# Altium PCB PCB1Ard.PcbDoc
Units mil, origin at the board's own origin, x right, y up, seen from the top; angles counter-clockwise.
Board outline 1968.5 x 2559.06 mil, 6 copper layers (Top Layer, Gnd, Signal_1, Signal_2, Power, Bottom Layer), stack 32.112 mil thick; 51 components, 61 nets, 238 pads, 77 vias.
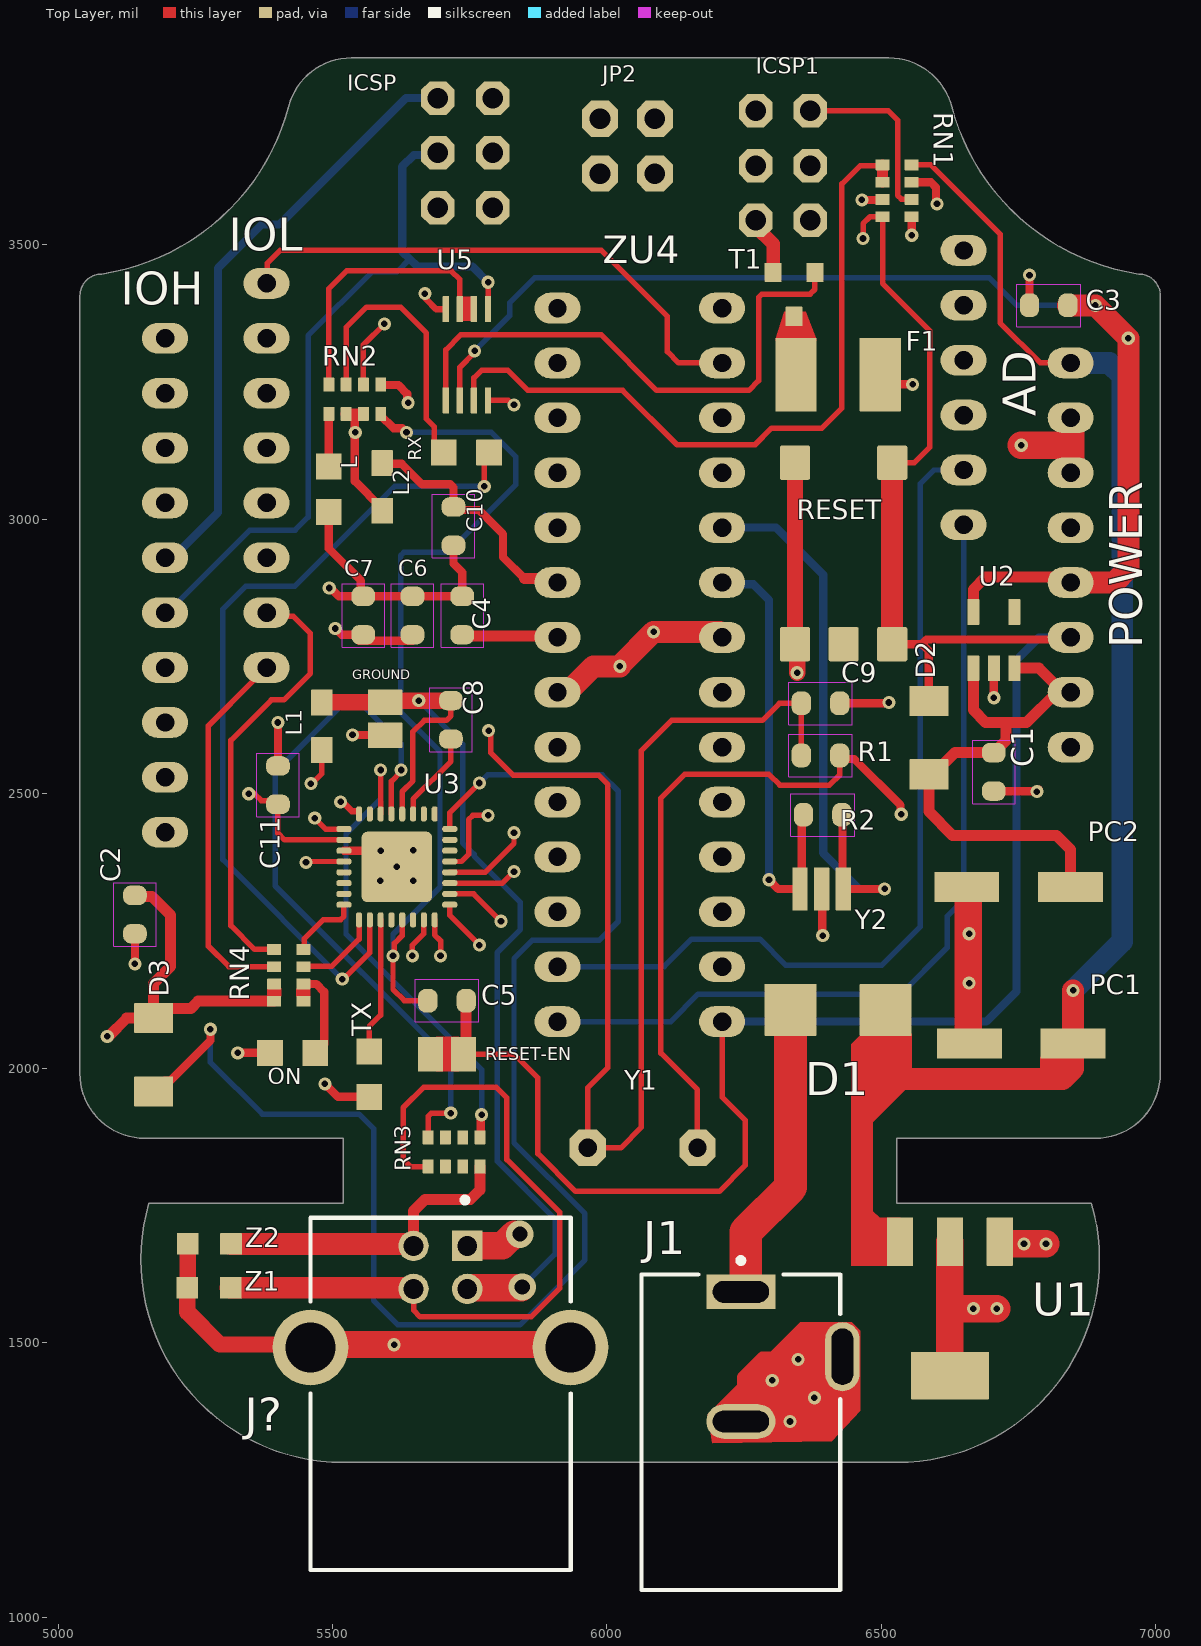
[diagram p0: Top Layer view]
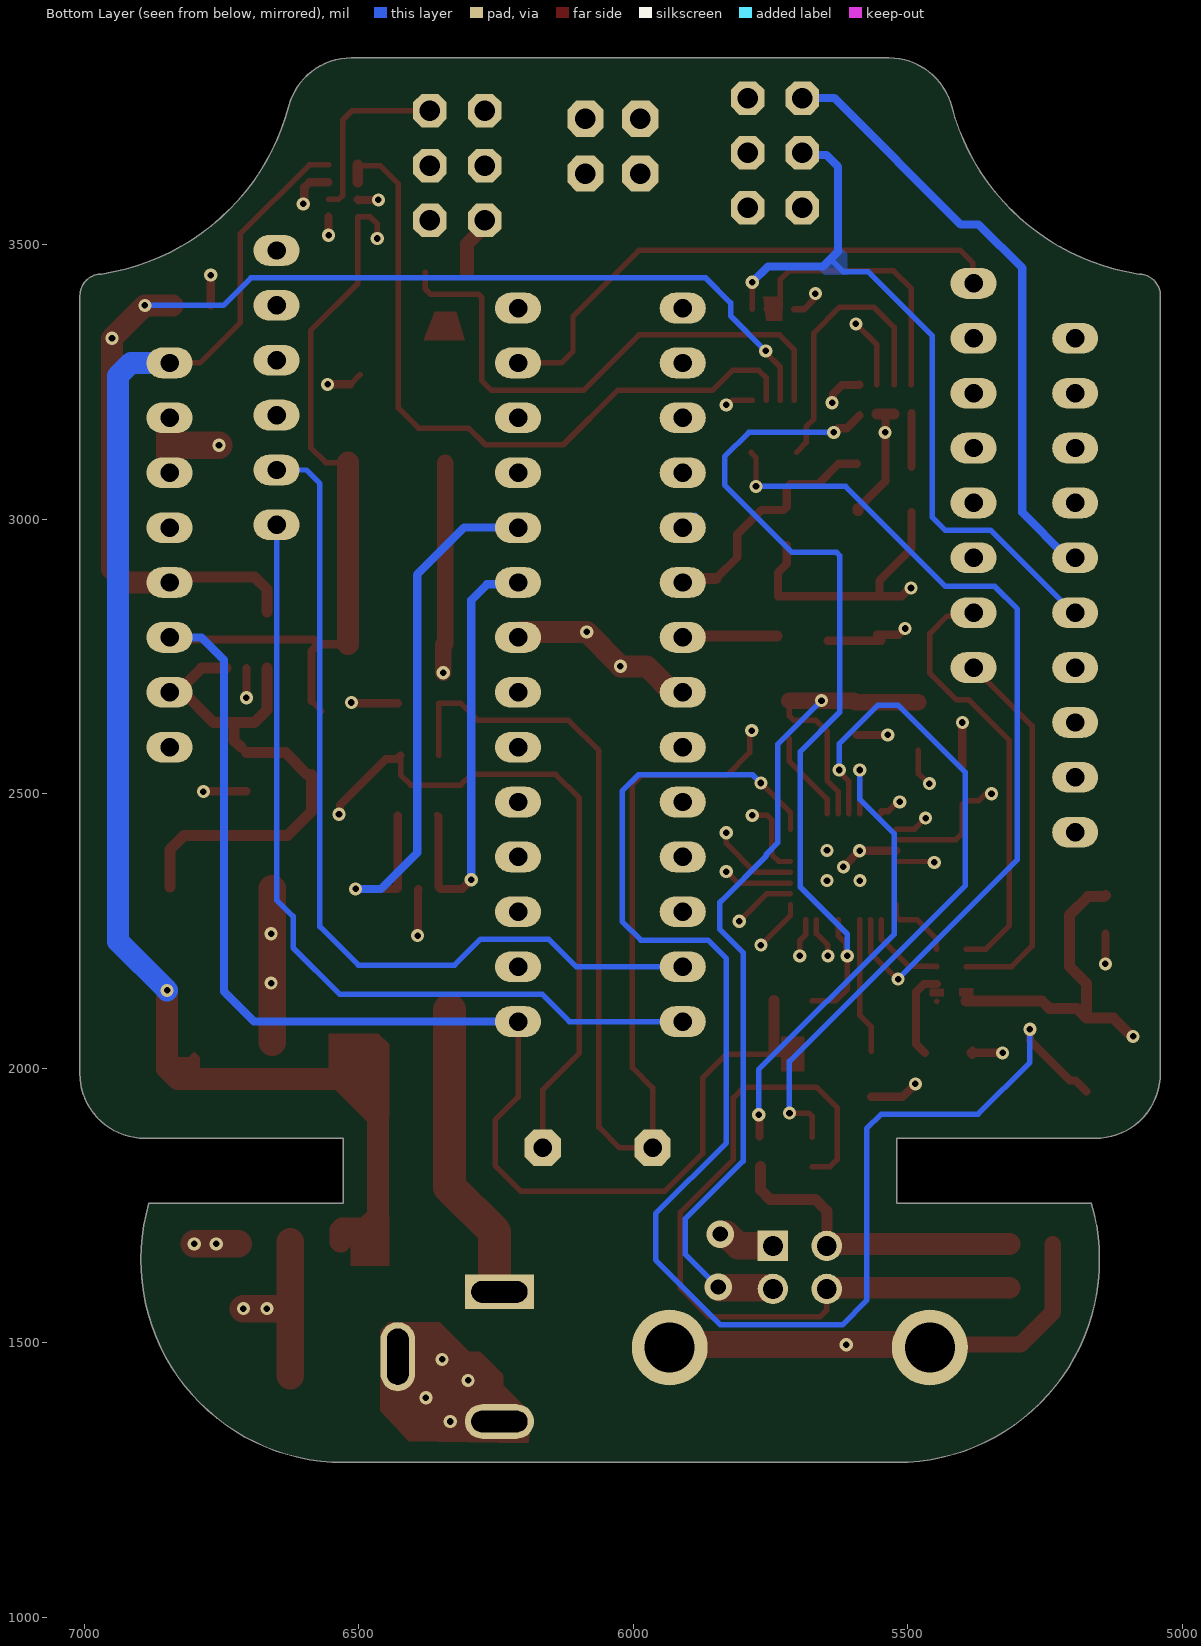
[diagram p1: Bottom Layer view, seen from below]
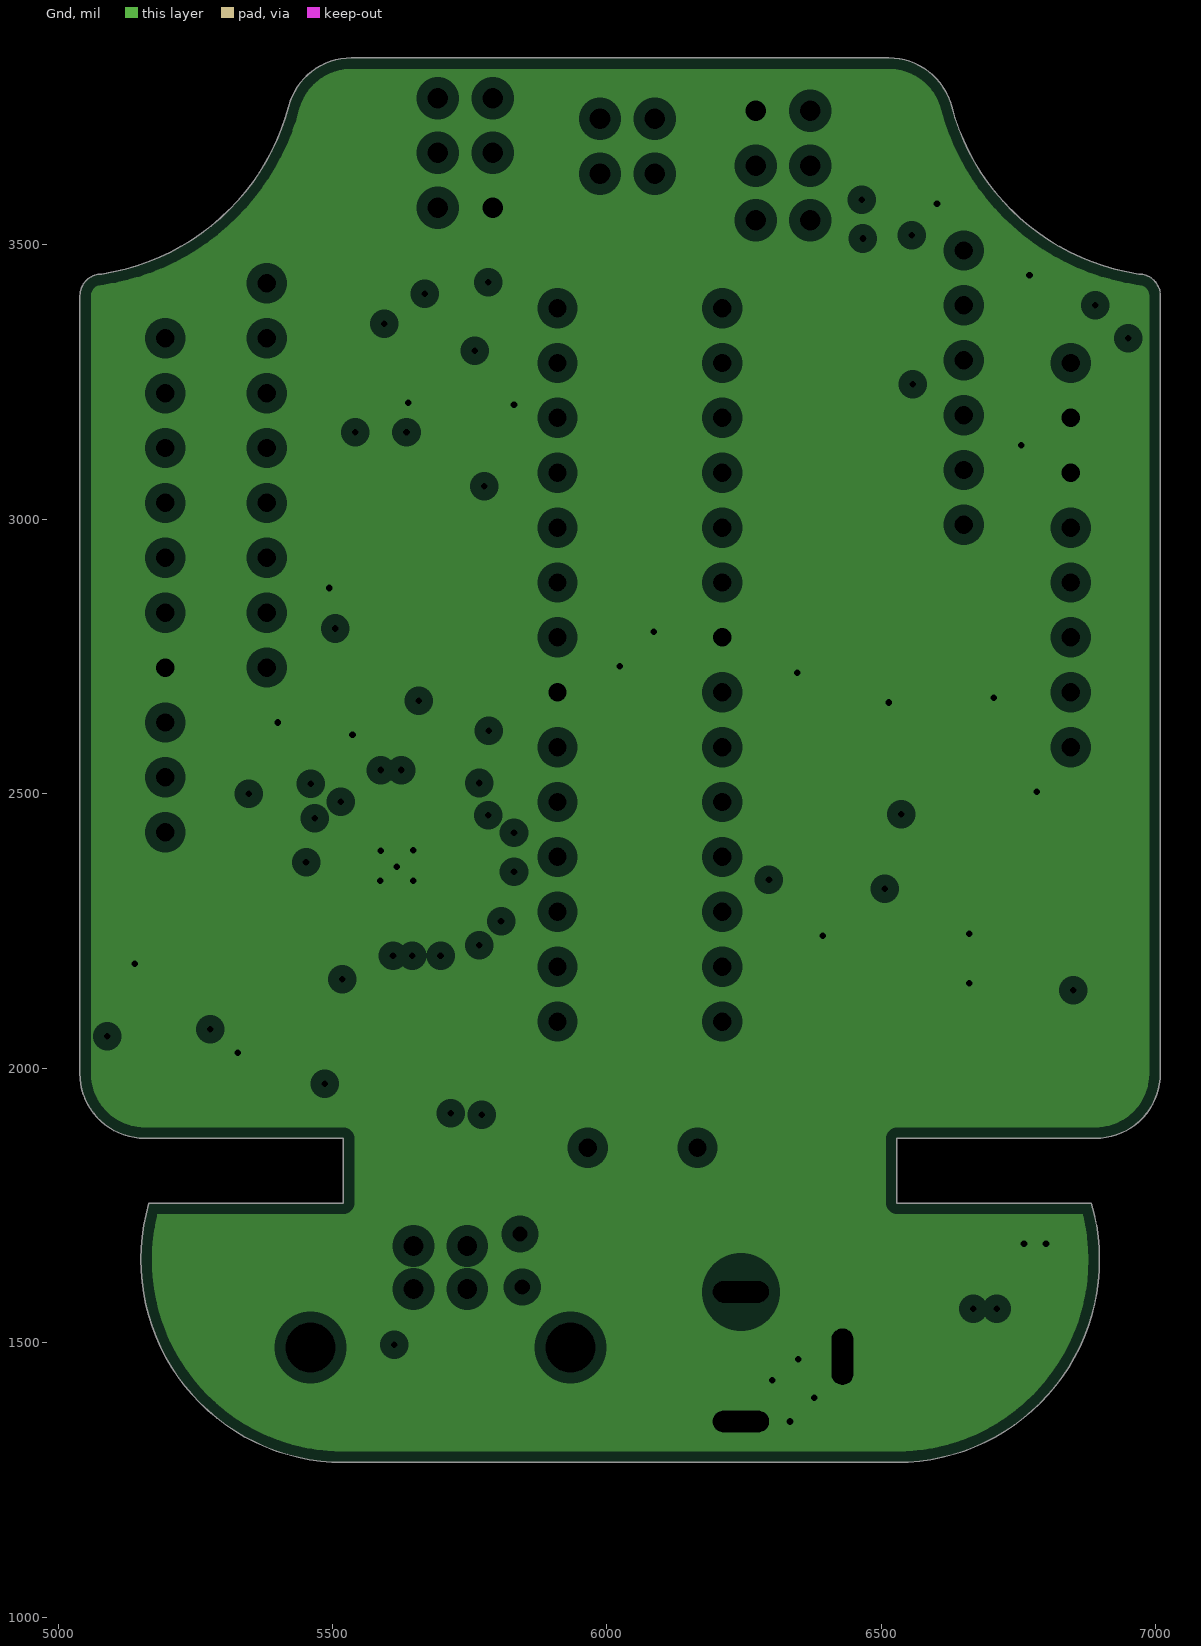
[diagram p2: Gnd, clearances drawn from the general rule]
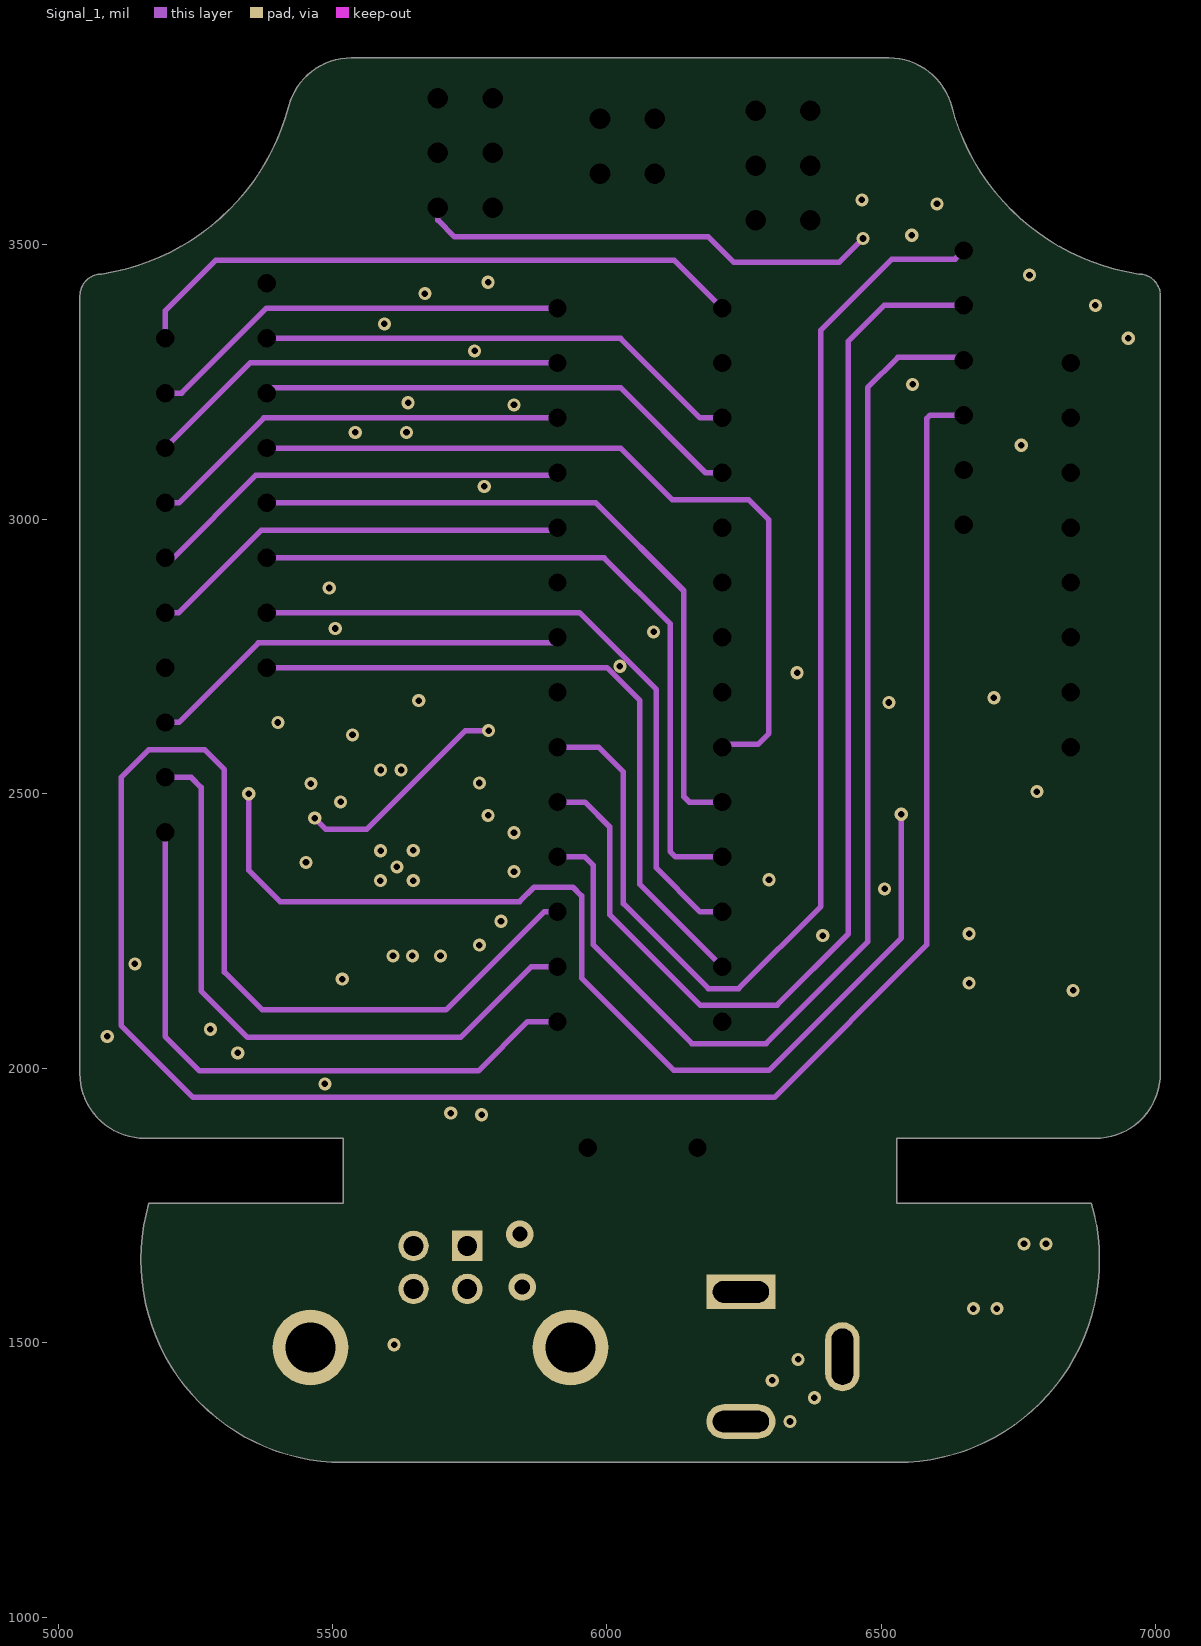
[diagram p3: Signal_1]
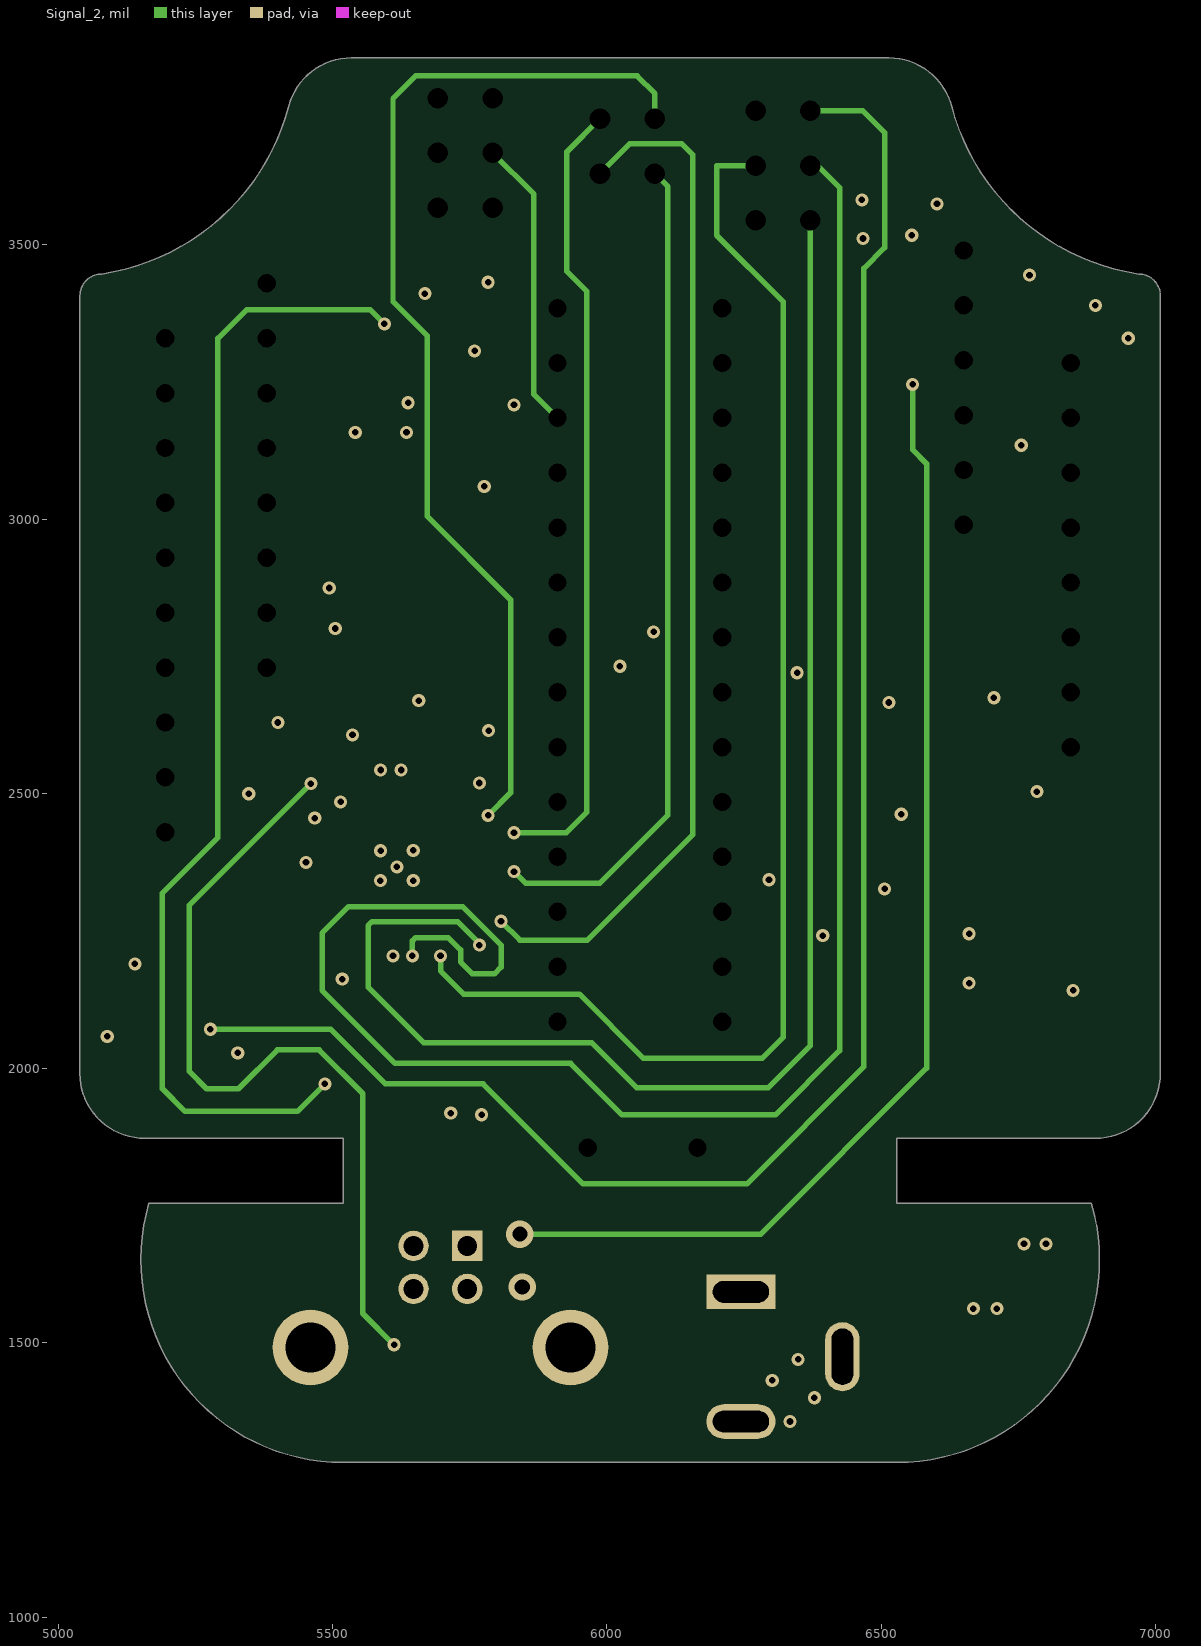
[diagram p4: Signal_2]
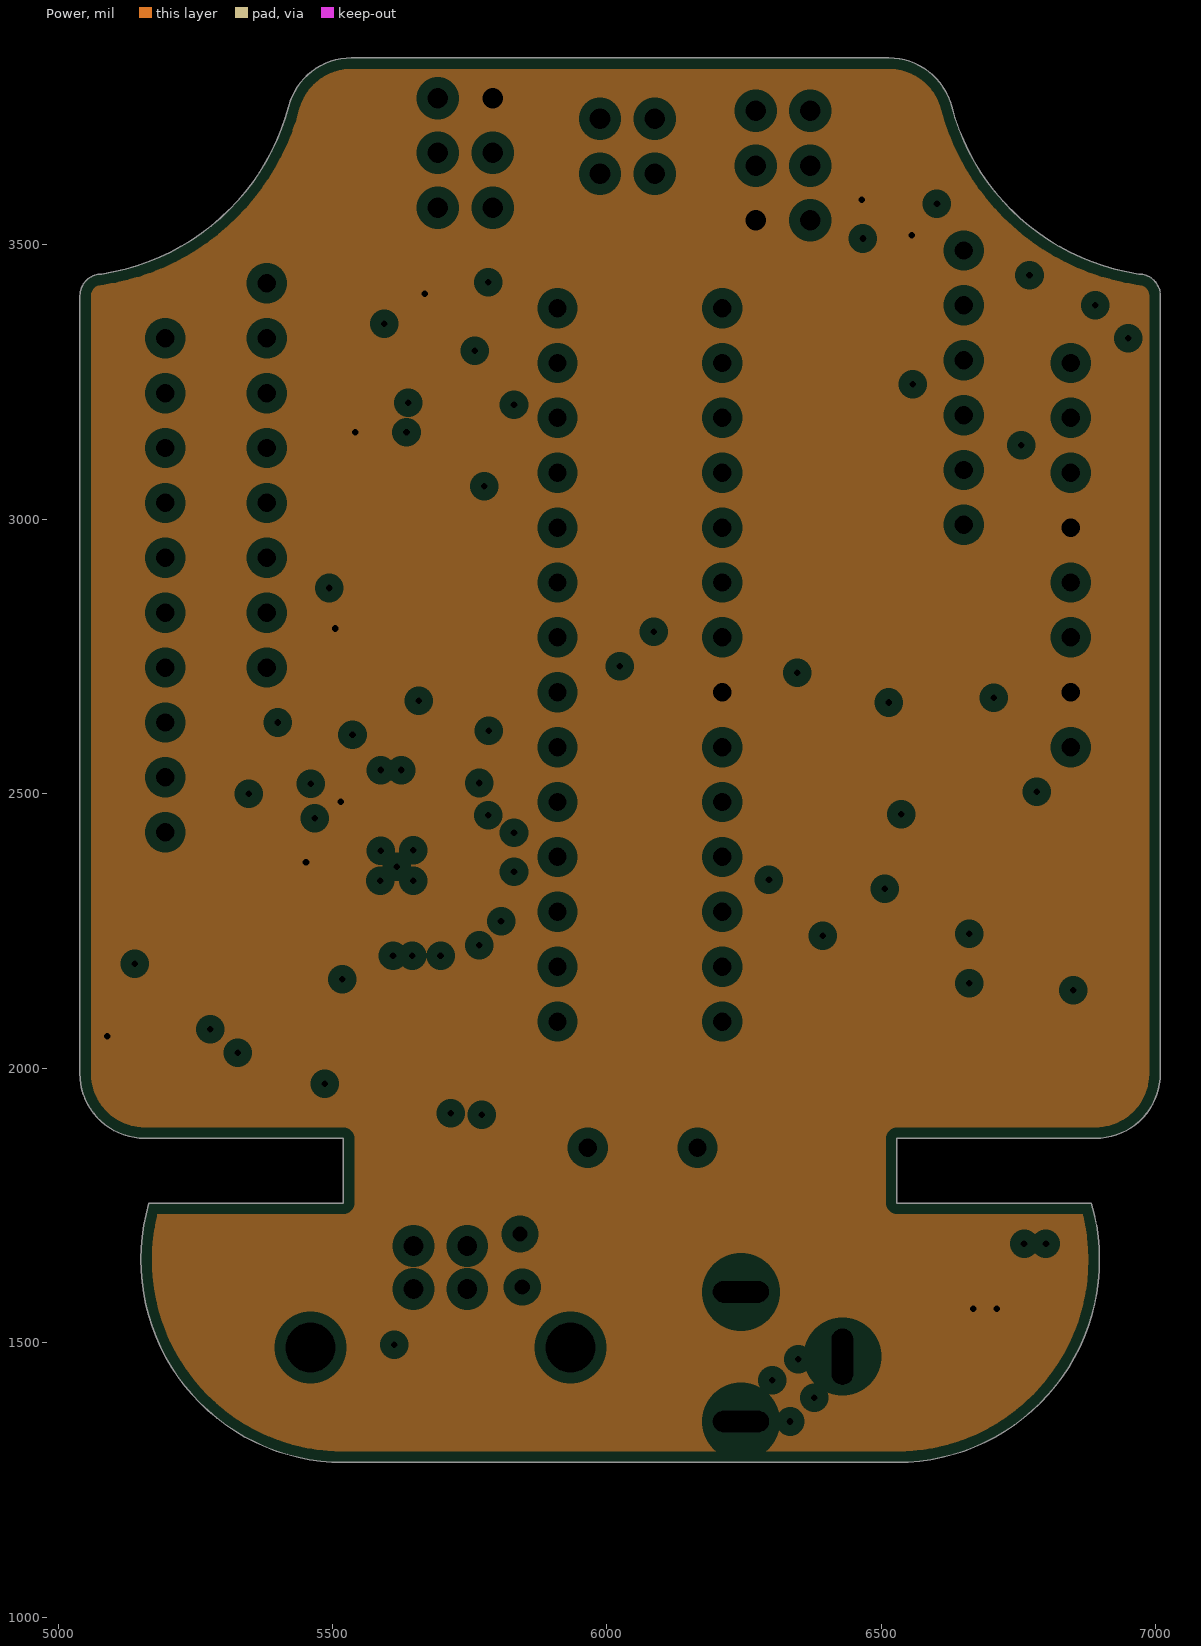
[diagram p5: Power, clearances drawn from the general rule]

## Layer stack, top to bottom
Top Solder: solder mask 0.4, Solder Resist, Dk 3.5
Top Layer: signal copper 1.4
Dielectric 2: prepreg 2.8, PP-006, Dk 4.1
Gnd: plane copper 1.378, net GND
Dielectric 4: prepreg 2.8, PP-006, Dk 4.1
Signal_1: signal copper 1.378
Dielectric 1: dielectric 12.6, FR-4, Dk 4.8
Signal_2: signal copper 1.378
Dielectric 5: prepreg 2.8, PP-006, Dk 4.1
Power: plane copper 1.378, net +5V
Dielectric 3: prepreg 2.8, PP-006, Dk 4.1
Bottom Layer: signal copper 1.4
Bottom Solder: solder mask 0.4, Solder Resist, Dk 3.5

## Board outline
5519.83,1754.15 5519.83,1872.26 5157.97,1872.26 cw(c5157.97,1990.37) 5039.86,1990.37 5039.86,3407.69 cw(c5079.23,3407.69) 5079.23,3447.06 ccw(c5017.47,3858.94) 5420.19,3752.76 cw(c5534.4,3722.65) 5534.4,3840.76 6513.82,3840.76 cw(c6513.82,3722.65) 6628.02,3752.76 ccw(c7030.75,3858.94) 6968.99,3447.06 cw(c6968.99,3407.69) 7008.36,3407.69 7008.36,1990.37 cw(c6890.25,1990.37) 6890.25,1872.26 6528.39,1872.26 6528.39,1754.15 6882.72,1754.15 cw(c6528.39,1650.8) 6528.39,1281.71 5519.83,1281.71 cw(c5519.83,1650.8) 5165.5,1754.15

## Design rules (kind name [scope] priority, off if disabled: settings)
Clearance [All] p1 off: gap=10 ignorepadtopadclearanceinfootprint=FALSE
PlaneClearance [All] p1: clearance=20
PlaneConnect [All] p1: planeconnectstyle=Relief reliefexpansion=20 reliefentries=4 reliefconductorwidth=10 reliefairgap=10
PolygonConnect [All] p1: connectstyle=Relief reliefconductorwidth=10 reliefentries=4 polygonreliefangle="90 Angle" airgapwidth=10
RoutingVias RoutingVias_GND [InNet('GND')] p1: holewidth=12 width=24 viastyle="Through Hole" minholewidth=12 minwidth=24 maxholewidth=18 maxwidth=30 useviatemplates=TRUE viatemplateguid#1={20CA0891-DAF0-4AA3-AA4B-DDA3A330327F} viatemplatename#1=v61h30
SolderMaskExpansion [All] p1: expansion=4 istentingtop=FALSE
SupplyNets "Schematic Supply Nets_1" [InNet('+5V')] p1: voltage=0.000
SupplyNets "Schematic Supply Nets" [InNet('GND')] p2: voltage=0.000
Width Width_GND_5v [InNet('GND') OR InNet('+5V')] p1: maxlimit=100 minlimit=10 preferedwidth=15 midlayer1_minwidth=15 midlayer2_minwidth=15 bottomlayer_minwidth=15 minimp=50.000000 maximp=50.000000 favimp=50.000000
28 further rules are at their usual default settings.

## Components (designator, comment, footprint, x,y, rotation, side; value= is the part's Value field where it differs from the comment)
AD "6x1F-H8.5" 1X06 6650,3240 r270 top
C1 "100n" C0603-ROUND 6705,2540 r90 top
C2 "100n" C0603-ROUND 5140,2280 r90 top
C3 "1u" C0603-ROUND 6805,3390 r0 top
C4 "100n" C0603-ROUND 5736.46,2824.85 r270 top
C5 "100n" C0603-ROUND 5708.66,2123.03 r0 top
C6 "100n" C0603-ROUND 5645.83,2824.85 r270 top
C7 "100n" C0603-ROUND 5556.1,2824.85 r90 top
C8 "1u" C0603-ROUND 5715.75,2634.89 r90 top
C9 "22p" C0603-ROUND 6389.25,2664.84 r0 top
C10 "100n" C0603-ROUND 5720.47,2987.76 r90 top
C11 "22p" C0603-ROUND 5400.59,2515.75 r90 top
D1 "M7" SMB 6421.26,2106.3 r180 top
D2 "CD1206-S01575" MINIMELF 6586.61,2602.36 r90 top
D3 "CD1206-S01575" MINIMELF 5174.21,2024.61 r270 top
F1 "MF-MSMF050-2 500mA" L1812 6421.26,3263.78 r0 top
GROUND "SJ" SJ 5595.75,2636.88 r90 top
ICSP "3x2 M" 2X03 5741.93,3667.72 r270 top
ICSP1 "3x2 M" 2X03 6320.87,3644.68 r90 top
IOH "10x1F-H8.5" 1X10 5195,2880 r270 top
IOL "8x1F-H8.5" 1X08 5380,3080 r90 top
J1 "PJ-102A" FP-PJ-102A-MFG 6244.09,1336.61 r180 top
J? "897-43-004-90-000000" FP-897-43-004-90-000000-MFG 5696.85,1406.5 r0 top
JP2 "2x2 M - NM" 2X02 6037.4,3680.12 r0 top
L "YELLOW" CHIP-LED0805 5493.19,3054.72 r180 top
L1 "BLM21" 0805 5480.75,2622.95 r270 top
L2 "10uH" 0805 5590.55,3059.06 r90 top
ON "GREEN" CHIP-LED0805 5427.24,2028.03 r90 top
PC1 "47u" PANASONIC_D 6755,2045 r0 top
PC2 "47u" PANASONIC_D 6750,2330 r0 top
POWER "8x1F-H8.5" 1X08 6845,2935 r90 top
R1 "1M" R0603-ROUND 6389.25,2569.84 r0 top
R2 "1M" R0603-ROUND 6393.19,2461.65 r0 top
RESET "TS42031-160R-TR-7260" TS42 6431.26,2938.03 r90 top
RESET-EN "SJ" SJ 5708.66,2025.59 r0 top
RN1 "10K" CAY16 6528.77,3598.7 r270 top
RN2 "1K" CAY16 5540.63,3218.86 r0 top
RN3 "22R" CAY16 5721.46,1847.44 r180 top
RN4 "1K" CAY16 5420.28,2169.29 r270 top
RX "YELLOW" CHIP-LED0805 5744.09,3122.05 r270 top
T1 "FDN340P" SOT-23 6340,3410 r0 top
TX "YELLOW" CHIP-LED0805 5566.93,1989.17 r0 top
U1 "NCP1117ST50T3G" SOT223 6625,1562.01 r180 top
U2 "LP2985-33DBVR" SOT23-DBV 6705,2780 r0 top
U3 "ATMEGA16U2-MU(R)" MLF32 5617.24,2366.81 r0 top
U5 "LMV358IDGKR" MSOP08 5745,3300 r0 top
Y1 "16MHz" QS 6065,1855 r180 top
Y2 "CSTCE16M0V53-R0 16MHZ" RESONATOR 6391.35,2326.65 r180 top
Z1 "CG0603MLC-05E" CT/CN0603 5275,1600 r180 top
Z2 "CG0603MLC-05E" CT/CN0603 5275.63,1680 r180 top
ZU4 "ATMEGA328P-PU" DIL28-3 6060,2735 r90 top

## Footprints (in the part's own frame and the unit in brackets; to place one, negate y for a bottom-side part, rotate by r counter-clockwise, add the part's x,y. Pads: shape width x height; smd on the part's side, far side on the other; paste and mask are expansions set on the pad)
1X06 [mil] "1X06"
  oval 56x84 / inner round 0 / far side oval 56x84 hole 33.46: 1(-250,0) 2(-150,0) 3(-50,0) 4(50,0) 5(150,0) 6(250,0)
1X08 [mil] "1X08"
  oval 56x84 / inner round 0 / far side oval 56x84 hole 33.46: 1(-350,0) 2(-250,0) 3(-150,0) 4(-50,0) 5(50,0) 6(150,0) 7(250,0) 8(350,0)
1X10 [mil] "1X10"
  oval 56x84 / inner round 0 / far side oval 56x84 hole 33.46: 1(-450,0) 2(-350,0) 3(-250,0) 4(-150,0) 5(-50,0) 6(50,0) 7(150,0) 8(250,0) 9(350,0) 10(450,0)
2X02 [mil] "2X02"
  oct 66x66 / inner round 0 / far side oct 66x66 hole 37.4: 1(-50,-50) 2(-50,50) 3(50,-50) 4(50,50)
2X03 [mil] "2X03"
  oct 61.02x61.02 / inner round 0 / far side oct 61.02x61.02 hole 37.4: 1(-100,-50) 2(-100,50) 3(0,-50) 4(0,50) 5(100,-50) 6(100,50)
0805 [mm] "0805"
  rrect5% 1.2x1 smd: 1(-1.1,0) 2(1.1,0)
C0603-ROUND [mil] "C0603-ROUND"
  rrect80% 35.37x43.31 smd: 1(-35,0) 2(35,0)
  Top Layer keep-out lines w2: -57.99,38.7 -57.99,-38.7 57.99,-38.7 57.99,38.7 -57.99,38.7
CAY16 [mm] "CAY16"
  rrect10% 0.5x0.65 smd: 1(-1.2,-0.675) 2(-0.4,-0.675) 3(0.4,-0.675) 4(1.2,-0.675) 5(1.2,0.675) 6(0.4,0.675) 7(-0.4,0.675) 8(-1.2,0.675)
CHIP-LED0805 [mil] "CHIP-LED0805"
  rrect4% 47.24x47.24 smd: A(0,-41.34) C(0,41.34)
CT/CN0603 [mm] "CT/CN0603"
  rrect5% 1x1 smd: 1(-1,0) 2(1,0)
DIL28-3 [mil] "DIL28-3"
  oval 56x84 / inner round 0 / far side oval 56x84 hole 33.46: 1(-650,-150) 2(-550,-150) 3(-450,-150) 4(-350,-150) 5(-250,-150) 6(-150,-150) 7(-50,-150) 8(50,-150) 9(150,-150) 10(250,-150) 11(350,-150) 12(450,-150) 13(550,-150) 14(650,-150) 15(650,150) 16(550,150) 17(450,150) 18(350,150) 19(250,150) 20(150,150) 21(50,150) 22(-50,150) 23(-150,150) 24(-250,150) 25(-350,150) 26(-450,150) 27(-550,150) 28(-650,150)
FP-897-43-004-90-000000-MFG [mm]
  rect 1.41x1.41 hole 0.91 paste-2539.97 mask+0: 1(1.24,6.85)
  round 1.41 hole 0.91 paste-2539.97 mask+0: 2(-1.25,6.85) 3(-1.25,4.86) 4(1.24,4.86)
  round 3.51 hole 2.31 paste-2539.97 mask+0: 5(-6.02,2.15) 6(6.02,2.15)
  silkscreen extent -6.02,-8.15 6.02,9.1, body extent -7.88,-8.25 7.88,8.25, height 0.25
FP-PJ-102A-MFG [mm]
  rect 3.2x1.6 hole 1 slot 2.6 at 0 deg paste-2539.97 mask+0: 1(0,-6.5)
  rrect100% 3.2x1.6 hole 1 slot 2.6 at 0 deg paste-2539.97 mask+0: 2(0,-0.5)
  rrect100% 1.6x3.2 hole 2.6 slot 1 at 0 deg paste-2539.97 mask+0: 3(-4.7,-3.5)
  silkscreen extent -4.6,-8.07 4.6,7.3, body extent -5.6,-7.4 4.7,7.4, height 0.25
L1812 [mil] "L1812"
  rrect2% 74.8x133.86 smd: 1(-76.77,0) 2(76.77,0)
MINIMELF [mm] "MINIMELF"
  rrect3% 1.4x1.8 smd: A(1.7,0) C(-1.7,0)
MLF32 [mil] "MLF32"
  rrect80% 27.56x11.02 smd: 1(-96.46,68.9) 2(-96.46,49.21) 3(-96.46,29.53) 4(-96.46,9.84) 5(-96.46,-9.84) 6(-96.46,-29.53) 7(-96.46,-49.21) 8(-96.46,-68.9) 17(96.46,-68.9) 18(96.46,-49.21) 19(96.46,-29.53) 20(96.46,-9.84) 21(96.46,9.84) 22(96.46,29.53) 23(96.46,49.21) 24(96.46,68.9)
  rrect80% 11.02x27.56 smd: 9(-68.9,-96.46) 10(-49.21,-96.46) 11(-29.53,-96.46) 12(-9.84,-96.46) 13(9.84,-96.46) 14(29.53,-96.46) 15(49.21,-96.46) 16(68.9,-96.46) 25(68.9,96.46) 26(49.21,96.46) 27(29.53,96.46) 28(9.84,96.46) 29(-9.84,96.46) 30(-29.53,96.46) 31(-49.21,96.46) 32(-68.9,96.46)
  rrect15% 128.11x128.11 smd paste+0 mask+0: 33(0,0)
MSOP08 [mil] "MSOP08"
  rrect16% 11.81x47.24 smd: 1(-38.43,-83.19) 2(-12.83,-83.19) 3(12.76,-83.19) 4(38.35,-83.19) 5(38.35,83.15) 6(12.76,83.15) 7(-12.83,83.15) 8(-38.43,83.15)
PANASONIC_D [mm] "PANASONIC_D"
  rrect3% 3x1.4 smd: +(2.4,0) -(-2.4,0)
QS [mil] "QS"
  oct 66x66 / inner round 0 / far side oct 66x66 hole 33.46: 1(-100,0) 2(100,0)
R0603-ROUND [mil] "R0603-ROUND"
  rrect80% 35.37x43.31 smd: 1(-35,0) 2(35,0)
  Top Layer keep-out lines w2: -57.99,-38.7 -57.99,38.7 57.99,38.7 57.99,-38.7 -57.99,-38.7
RESONATOR [mm] "RESONATOR"
  rrect7% 0.7x2 smd: 1(-1,0) 2(0,0) 3(1,0)
SJ [mil] "SJ"
  rrect4% 46x63 smd: 1(-30,0) 2(30,0)
SMB [mil] "SMB"
  rrect2% 94.49x94.49 smd: A(86.61,0) C(-86.61,0)
SOT23-DBV [mil] "SOT23-DBV"
  rrect9% 21.65x47.24 smd: 1(-37.4,-51.18) 2(0,-51.18) 3(37.4,-51.18) 4(37.4,51.18) 5(-37.4,51.18)
SOT223 [mil] "SOT223"
  rrect4% 48x88 smd: 1(-91,-122) 2(0,-122) 3(91,-122)
  rrect2% 141.73x86.61 smd: 4(0,122.01)
SOT-23 [mil] "SOT-23"
  rrect6% 31x35 smd: 1(1,-40) 2(-37,40) 3(39,40)
TS42 [mil] "TS42"
  rrect15% 62.99x55.12 smd: 1(-165.35,88.58) 2(165.35,88.58) 3(-165.35,-88.58) 4(165.35,-88.58)
  rrect15% 62.99x55.12 smd paste+0: 5(-165.35,0)

## Part data
AD: library part PINHD-1X6, "PIN HEADER", DeviceSetName=PINHD-1X6, GateName_1=A, LibraryName=SmartPrj, SymbolName_1=PINHD6
C1 C2 C3 C4 C5 C6 C7 C8 C9 C10 C11: library part C-EU0603-RND, "CAPACITOR, European symbol", DeviceName=0603-RND, DeviceSetName=C-EU, GateName_1=G$1, LibraryName=SmartPrj, SymbolName_1=C-EU
D1: library part DIODE-SMB, "DIODE", DeviceName=SMB, DeviceSetName=DIODE-, GateName_1=G$1, LibraryName=diode, SymbolName_1=D
D2 D3: library part DIODE-MINIMELF, "DIODE", DeviceName=MINIMELF, DeviceSetName=DIODE-, GateName_1=G$1, LibraryName=diode, SymbolName_1=D
F1: library part L-EUL1812, "INDUCTOR, European symbol", DeviceName=L1812, DeviceSetName=L-EU, GateName_1=G$1, LibraryName=rcl, SymbolName_1=L-EU
GROUND RESET-EN: "SMD solder JUMPER", DeviceSetName=SJ, GateName_1=1, LibraryName=jumper, SymbolName_1=SJ
ICSP ICSP1: library part PINHD-2X3, "PIN HEADER", DeviceSetName=PINHD-2X3, GateName_1=A, LibraryName=SmartPrj, SymbolName_1=PINH2X3
IOH: library part PINHD-1X10_ARD, "PIN HEADER", DeviceSetName=PINHD-1X10_ARD, GateName_1=A, LibraryName=SmartPrj, SymbolName_1=PINHD10
IOL POWER: library part PINHD-1X8, "PIN HEADER", DeviceSetName=PINHD-1X8, GateName_1=A, LibraryName=SmartPrj, SymbolName_1=PINHD8
J1: library part CMP-12637-106234071-1, "PJ-102A 2.0 x 6.5 mm, 2.5 A, Horizontal, Through Hole, Tapered Pins, Dc Power Jack Connector", Color=Black, Current Rating=2.5A, Flammability Rating="UL94 V-0", Insulation Resistance=50MΩ, Max Operating Temperature=85°C, Min Operating Temperature=-25°C, Voltage Rating=24V, Contact Gender=Male, Contact Material="Copper, Nickel, Tin", Contact Plating=Nickel, Diameter=2.1mm, Gender=Male, Height=11.2mm, Housing Color=Black, Housing Material=Thermoplastic, Inside Diameter=2mm, Lead Free="Lead Free", Lifecycle Status=Production, Mount="Through Hole", NexarPartId=106234071, Number of Conductors=2, Number of Contacts=3, Orientation=Horizontal, Outside Diameter=6.5mm, Packaging=Bulk, RoHS=Compliant, Schedule B="8536695050, 8536695050", Shielding=No, Termination="Through Hole", Voltage Rating (DC)=24V
J?: library part CMP-07782-000001-1, "CONN RCPT USB2.0 TYPEB 4POS R/A", Flammability Rating="UL94 V-0", Insulation Resistance=1GR, Max Current Rating=1A, Max Voltage Rating (AC)=30V, Package Quantity=150, Connector Type=USB, Contact Material="Copper Alloy", Contact Plating=Gold, Depth=16mm, Gender=Receptacle, Housing Material=Thermoplastic, Lead Free="Lead Free", Length=12.03mm, Mount="Through Hole", Number of Contacts=4, Number of Ports=1, Number of Positions=4, Number of Terminals=4, Orientation="Right Angle", Packaging=Tray, REACH SVHC="No SVHC", Termination="Through Hole", USB Standard="USB 2.0"
JP2: library part PINHD-2X2, "PIN HEADER", DeviceSetName=PINHD-2X2, GateName_1=A, LibraryName=SmartPrj, SymbolName_1=PINH2X2
L ON RX TX: library part LEDCHIP-LED0805, "LED   OSRAM: - CHIPLED LG R971, LG N971, LY N971, LG Q971, LY Q971, LO R971, LY R971 LH N974, LH R974 LS Q976, LO Q976, LY Q976 LO Q996 - Hyper CHIPLED LW Q18S LB Q993, LB Q99A, LB R99A - SideLED LS A670, LO A670, LY A670, LG A670, LP A670 LB A673, LV A673, LT A673, LW A673 LH A674 LY A675 LS A676, LA A676, LO A676, LY A676, LW A676 LS A679, LY A679, LG A679 -  Hyper Micro SIDELEDÂ® LS Y876, LA Y876, LO Y876, LY Y876 LT Y87S - SmartLED LW L88C, LW L88S LB L89C, LB L89S, LG L890 LS L89K, LO L89K, LY L89K LS L896, LA L896, LO L896, LY L896 - TOPLED LS T670, LO T670, LY T670, LG T670, LP T670 LSG T670, LSP T670, LSY T670, LOP T670, LYG T670 LG T671, LOG T671, LSG T671 LB T673, LV T673, LT T673, LW T673 LH T674 LS T676, LA T676, LO T676, LY T676, LB T676, LH T676, LSB T676, LW T676 LB T67C, LV T67C, LT T67C, LS T67K, LO T67K, LY T67K, LW E67C LS E67B, LA E67B, LO E67B, LY E67B, LB E67C, LV E67C, LT E67C LW T67C LS T679, LY T679, LG T679 LS T770, LO T770, LY T770, LG T770, LP T770 LB T773, LV T773, LT T773, LW T773 LH T774 LS E675, LA E675, LY E675, LS T675 LS T776, LA T776, LO T776, LY T776, LB T776 LHGB T686 LT T68C, LB T68C - Hyper Mini TOPLEDÂ® LB M676 - Mini TOPLED SantanaÂ® LG M470 LS M47K, LO M47K, LY M47K    Source: http://www.osram.convergy.de   LUXEON: - LUMILEDÂ® LXK2-PW12-R00, LXK2-PW12-S00, LXK2-PW14-U00, LXK2-PW14-V00 LXK2-PM12-R00, LXK2-PM12-S00, LXK2-PM14-U00 LXK2-PE12-Q00, LXK2-PE12-R00, LXK2-PE12-S00, LXK2-PE14-T00, LXK2-PE14-U00 LXK2-PB12-K00, LXK2-PB12-L00, LXK2-PB12-M00, LXK2-PB14-N00, LXK2-PB14-P00, LXK2-PB14-Q00 LXK2-PR12-L00, LXK2-PR12-M00, LXK2-PR14-Q00, LXK2-PR14-R00 LXK2-PD12-Q00, LXK2-PD12-R00, LXK2-PD12-S00 LXK2-PH12-R00, LXK2-PH12-S00 LXK2-PL12-P00, LXK2-PL12-Q00, LXK2-PL12-R00    Source: www.luxeon.com   KINGBRIGHT:   KA-3528ASYC Source: www.kingbright.com", DeviceName=CHIP-LED0805, DeviceSetName=LED, GateName_1=G$1, LibraryName=led, SymbolName_1=LED
L1: library part WE-CBF_0805, "SMD EMI Suppression Ferrite Beads - excellent anti-EMI properties - low DCR - impedances till 3000 ohms - rated current up to 6 A", DeviceName=_0805, DeviceSetName=WE-CBF, GateName_1=G$1, LibraryName=wuerth-elektronik, SymbolName_1=L
L2: library part 0715_CV201210-100K, "10uH 0805", CASE=0805, DeviceSetName=0715_CV201210-100K, GateName_1=G$1, LibraryName=Induttanze, MONTHLY_USAGE=_____, PART_NUMBER=CV201210-100K, PRICE=_____, SUPPLIER=_____, SymbolName_1=L, TYPE=Induttanze
PC1 PC2: library part CPOL-EUD, "POLARIZED CAPACITOR, European symbol", +=+, DeviceName=D, DeviceSetName=CPOL-EU, GateName_1=G$1, LibraryName=rcl, SymbolName_1=CPOL
R1 R2: library part R-EU_R0603, "RESISTOR, European symbol", DeviceName=R0603, DeviceSetName=R-EU_, GateName_1=G$1, LibraryName=SmartPrj, SymbolName_1=R-EU
RESET: library part TS42, "TS42 Dongnan Electronics Tact switch VDC 12V - 50mA", DeviceSetName=TS42, GateName_1=G$1, LibraryName=SmartPrj, SymbolName_1=ST-MOD_V1.4_TS42
RN1 RN2 RN3 RN4: library part 4R-NCAY16, "Array Chip Resistor   Source: RS Component / Phycomp", DeviceName=CAY16, DeviceSetName=4R-N, GateName_1=A, GateName_2=B, GateName_3=C, GateName_4=D, LibraryName=resistor-dil, SymbolName_1=R1NV, SymbolName_2=R1NV, SymbolName_3=R1NV, SymbolName_4=R1NV
T1: library part PMOSSOT23, "MOS FET", DeviceSetName=PMOSSOT23, GateName_1=A, LibraryName=zetex, SymbolName_1=P_MOSFET
U1: library part MC33269ST*, "Adjustable Output Low Dropout Voltage Regulator 800 mA   Source: http://www.onsemi.com/pub/Collateral/MC33269-D.PDF", DeviceSetName=MC33269ST*, GateName_1=G$1, LibraryName=linear, SymbolName_1=VREG-O2
U2: library part LP2985-XXDBVR, "ULTRALOW-POWER 50-mA LOW-DROPOUT LINEAR REGULATORS   50-mA Low-Dropout Regulator Source: http://focus.ti.com/lit/ds/symlink/tps77001.pdf", DeviceSetName=LP2985-XXDBVR, GateName_1=G$1, LibraryName=SmartPrj, SymbolName_1=LP2985-XXDBVR
U3: library part ATMEGA16U2-MU, DeviceName=MU, DeviceSetName=ATMEGA16U2-, GateName_1=G$1, LibraryName=SmartPrj, SymbolName_1=ATMEL_MEGA8U2
U5: library part LMV358?*MM, "Dual General Purpose, Low Voltage, Rail-to-Rail Output Operational Amplifiers   Source: http://www.national.com/mpf/LM/LMV321.html http://www.national.com/dt/lmv_qual.pdf", DeviceName=MM, DeviceSetName=LMV358?*, GateName_1=A, GateName_2=B, GateName_3=P, LibraryName=linear, SymbolName_1=OPAMP, SymbolName_2=OPAMP, SymbolName_3=PWR+-, V+=V+, V-=V-
Y1: library part XTAL/S, "CRYSTAL", DeviceSetName=XTAL/S, GateName_1=G$1, LibraryName=SmartPrj, SymbolName_1=XTAL
Y2: library part RESONATORMU, DeviceName=MU, DeviceSetName=RESONATOR, GateName_1=G$1, LibraryName=SmartPrj, SymbolName_1=RESONATOR
Z1 Z2: library part VARISTORCN0603, "VARISTOR", DeviceName=CN0603, DeviceSetName=VARISTOR, GateName_1=G$1, LibraryName=varistor, SymbolName_1=VARISTOR
ZU4: "MICROCONTROLLER   4 Kbytes FLASH   128 bytes SRAM   256 bytes EEPROM   UART   6-channel 10 bit ADC", DeviceName=PU, DeviceSetName=ATMEGA328P-, GateName_1=G$1, LibraryName=SmartPrj, SymbolName_1=20-I/O-2

## Via types
v1: diameter 24, hole 12, Top Layer to Bottom Layer, 75 vias
v2: diameter 50, hole 28, Top Layer to Bottom Layer, 2 vias

## Nets (pads, with @x,y where several pads share a name; then routed paths per layer and width w, separated by ;. In a path a pad name is that pad's centre, name@x,y a point inside that pad or via, vN(x,y) a via of type N, cw(c..) or ccw(c..) an arc to the next point about the centre after c; other vN are vias at no path point)
+3V3: C3.2 POWER.4 U2.5 U5.2 | length 2224.6
  Top Layer w10: U5.2 5732.17,3277.21 5758.86,3303.89 v1(5758.86,3307.09)
  Top Layer w20: U2.5 6667.6,2872.65 6690,2895.05 6811.21,2895.05 6821.26,2885 POWER.4
  Top Layer w40: C3.2 v1(6890,3390) v1(6950,3330) 6950,2910 6925,2885 POWER.4
  Bottom Layer w10: v1(5758.86,3307.09) 5822.83,3371.06 5822.83,3394.68 5868.15,3440 6697.01,3440 6747.01,3390 v1(6890,3390)
+5V: C1.2 C2.2 C6.2 C7.1 D2.C D3.C ICSP1.2 ICSP.2 L2.1 PC2.+ POWER.2 POWER.5 RN1.3 RN1.5 RN2.2 RN2.3 RN4.3 RN4.4 T1.2 U1.2 U1.4 U2.1 U2.3 U3.4 U3.32 U5.8 ZU4.7 | length 2686.8
  Top Layer w10: v1@5453.42,2376.65 U3.4 ; v1(5514.76,2485.24) v1@5518.55,2485.24 ; U3.32@5547.83,2468.32 5548.34,2467.81 U3.32 ; v1(5668.31,3411.42) v1@5670.99,3408.74
  Top Layer w11.7: v1@5670.99,3408.74 5670.99,3400.86 5688.7,3383.15 U5.8
  Top Layer w12: v1@5518.55,2485.24 5535.47,2468.32 U3.32@5547.83,2468.32
  Top Layer w15: v1(5089.57,2058.07) v1@5092,2058.07 ; C2.2 C2.2 ; D3.C@5173.81,2091.13 D3.C ; v1(5451.77,2375) v1@5453.42,2376.65 ; v1(5504.92,2801.18) 5516.25,2789.85 C7.1 ; 5540.63,3192.29 5540.63,3069.6 L2.1@5590.55,3019.68 ; C7.1@5548.23,2778.82 C6.2@5645.83,2778.82 ; ICSP1.2@6270.87,3533.82 ICSP1.2 ; v1(6464.57,3582.07) 6500.58,3582.07 6500.95,3581.69 RN1.3 ; v1(6555.34,3517.72) RN1.5 ; D2.C D2.C@6594.49,2535.43 ; C1.2@6705.37,2575 6715.05,2584.68 C1.2@6715.05,2585.05 ; POWER.2@6819.91,2685 6831,2685 POWER.2
  Top Layer w20: v1@5092,2058.07 5125.06,2091.13 D3.C@5173.81,2091.13 ; C2.2 5142.24,2312.76 5171.24,2312.76 5205,2279 5205,2185.32 5174.21,2154.53 D3.C 5191.68,2109 5242,2109 5255.05,2122.05 RN4.4 ; RN2.2 5540.63,3192.29 RN2.3 ; L2.1 L2.1@5590.55,3019.68 ; D2.C 6586.61,2467.52 6629.92,2424.21 6818.9,2424.21 6844.49,2398.62 PC2.+ ; D2.C@6594.49,2535.43 6634.06,2575 C1.2 ; U2.1 6667.6,2652.4 6690.08,2629.92 6727.45,2629.92 ; C1.2@6715.05,2585.05 6727.45,2597.45 6727.45,2629.92 ; U2.3 6787.18,2728.82 POWER.2@6831,2685 ; POWER.2@6819.91,2685 6764.83,2629.92 6727.45,2629.92
  Top Layer w25: ICSP1.2@6270.87,3533.82 6303,3501.69 T1.2
  Top Layer w50: U1.4 6625,1562.01 ; U1.2 6625,1562.01 ; v1(6710.63,1562.01) v1(6667.82,1562.01) 6625,1562.01
  other v1: 5541.34,3158.46
AD0: AD.1 ZU4.23 | length 2235
  Signal_1 w10: ZU4.23 5985,2585 6030,2540 6030,2300 6185,2145 6240,2145 6390,2295 6390,3345 6519.41,3474.41 6634.41,3474.41 AD.1
AD1: AD.2 ZU4.24 | length 2147.8
  Signal_1 w10: ZU4.24 5960,2485 6005,2440 6005,2280 6170,2115 6310,2115 6440,2245 6440,3325 6505,3390 AD.2
AD2: AD.3 ZU4.25 | length 2077.3
  Signal_1 w10: ZU4.25 5960,2385 5975,2370 5975,2225 6155,2045 6290,2045 6475,2230 6475,3240 6530,3295 6645,3295 AD.3
AD3: AD.4 ZU4.26 | length 4420.2
  Signal_1 w10: ZU4.26 5885.39,2285 5706.69,2106.3 5372.05,2106.3 5303.15,2175.2 5303.15,2544.29 5267.44,2580 5165,2580 5115,2530 5115,2077.91 5245.91,1947 6305,1947 6583,2225 6583,3184.14 6588.86,3190 AD.4
AD4/SDA: AD.5 IOH.9 ZU4.27 | length 2808.8
  Signal_1 w10: IOH.9 5242.64,2530 5260.83,2511.81 5260.83,2140.75 5345.47,2056.1 5733.27,2056.1 5862.17,2185 ZU4.27
  Bottom Layer w10: ZU4.27 6104.29,2185 6154.53,2235.24 6278.54,2235.24 6325.79,2187.99 6500.98,2187.99 6571,2258.01 6571,3065.1 6595.91,3090 AD.5
AD5/SCL: AD.6 IOH.10 ZU4.28 | length 2699
  Signal_1 w10: IOH.10 5195,2057.95 5257.87,1995.08 5765.75,1995.08 5855.67,2085 ZU4.28
  Bottom Layer w10: ZU4.28 6116.5,2085 6166.34,2134.84 6535.43,2134.84 6620.08,2219.49 6620.08,2276.57 6650,2306.5 AD.6
AREF: C4.2 IOH.8 ZU4.21 | length 954.8
  Top Layer w10: C4.2 C4.2@5738.43,2787.88 ; ZU4.21@5907.12,2787.88 ZU4.21
  Top Layer w20: C4.2@5738.43,2787.88 ZU4.21@5907.12,2787.88
  Signal_1 w10: IOH.8 5220,2630 5365,2775 5900,2775 ZU4.21
AVCC: C10.2 L2.2 ZU4.20 | length 452.4
  Top Layer w15: L2.2@5592.52,3101.38 5625.98,3101.38 5663.36,3064 5714.61,3064 5720.47,3058.14 C10.2 5726.23,3017 5766.6,3017 5810.57,2973.03 5810.57,2931.03 5849.71,2891.89
  Top Layer w20: 5849.71,2891.89 5903.11,2891.89 ZU4.20
CMP: RN1.1 RN1.2 U5.3 | length 1327.5
  Top Layer w10: U5.3 5757.76,3257.76 5771.65,3271.65 5819.35,3271.65 5856,3235 6028.78,3235 6127.78,3136 6269.86,3136 6300.2,3166.34 6391.73,3166.34 6428.15,3202.76 6428.15,3611.22 6461.64,3644.71 RN1.1@6500.51,3644.71 ; RN1.1@6501.97,3646.17 RN1.1
  Top Layer w20: RN1.2 RN1.1
D+: J?.3 RN3.5 Z1.1 | length 1407.4
  Top Layer w10: J?.3 5647.64,1559.06 5659.69,1547 5861.96,1547 5914.37,1599.41 5914.37,1737.2 5817.91,1833.66 5817.91,1945.87 5798.23,1965.55 5666.34,1965.55 5628.94,1928.15 5628.94,1833.61 5641.68,1820.87 RN3.5
  Top Layer w40: Z1.1 J?.3@5645.47,1600
D-: J?.2 RN3.8 Z2.1 | length 577.5
  Top Layer w20: J?.2 5647.64,1740.16 5668.31,1760.83 5750.98,1760.83 5768.7,1778.54 RN3.8
  Top Layer w40: Z2.1 5632.85,1680 5633.7,1679.15 5644.67,1679.15 J?.2
DTR: C5.1 RN2.4 U3.13 | length 1594.3
  Top Layer w10: RN2.4@5587.87,3189.34 RN2.4 ; U3.13 5627.08,2241.57 5612.91,2227.4 5612.91,2207.4 v1(5610.24,2204.72) 5610.24,2143.7 5630.91,2123.03 C5.1 ; v1@5627.19,3166.12 v1(5634.84,3158.46)
  Top Layer w15: RN2.4@5587.87,3189.34 5611.09,3166.12 v1@5627.19,3166.12
  Bottom Layer w10: v1(5610.24,2204.72) 5610.24,2244.09 5695.87,2329.72 5695.87,2576.77 5624.02,2648.62 5624.02,2934.1 5629.87,2939.96 5710.63,2939.96 5833.66,3062.99 5833.66,3114.17 5789.37,3158.46 v1(5634.84,3158.46)
GATE_CMD: T1.3 U5.1 | length 1013.2
  Top Layer w10: U5.1 5706.57,3308.93 5733.64,3336 5989.79,3336 6090.55,3235.24 6258.86,3235.24 6276.57,3252.95 6276.57,3404.58 6282.43,3410.43 6370.08,3410.43 6379,3419.35 T1.3
GND: C1.1 C2.1 C3.1 C4.1 C6.1 C7.2 C9.2 C10.1 C11.2 GROUND.1 ICSP1.6 ICSP.6 IOH.7 J1.2 J1.3 L.C ON.C PC1.- PC2.- POWER.6 POWER.7 RESET.1 RESET.2 RN1.7 RN2.5 U1.1 U2.2 U3.3 U3.33 U5.4 Y2.2 ZU4.8 ZU4.22 | length 3206.1
  Top Layer w10: U5.4 5820.12,3216.81 v1@5828.27,3208.66
  Top Layer w15: v1(5140,2190) C2.1 ; v1(5327.24,2028.03) ON.C ; ON.C@5382.27,2024.4 ON.C ; ON.C@5382.27,2031.66 ON.C ; C11.2 v1(5400.59,2629.92) ; L.C 5493.19,2946.77 5551.67,2888.29 5551.67,2864.28 C7.2 ; v1(5494.09,2875) 5496.53,2875 5511.68,2859.85 C7.2 ; U3.3 v1(5587.71,2396.34) v1(5617.24,2366.81) ; v1(5536.42,2607.28) 5536.62,2607.08 5592.59,2607.08 GROUND.1@5592.79,2607.28 ; RN2.5 5589.43,3245.43 5590.21,3244.64 5620.21,3244.64 5636.07,3228.78 5636.07,3214.32 v1(5637.8,3212.6) ; C10.1 5720.47,2919.29 5736.46,2903.31 C4.1 C6.1 C7.2 ; v1@5828.27,3208.66 v1(5830.71,3208.66) ; J1.2 6244.09,1437.99 6282.48,1476.38 6427.17,1476.38 J1.3 ; Y2.2 6392.27,2325.73 6392.27,2242.57 v1(6393.19,2241.65) ; C9.2@6429.25,2664.84 6512.28,2664.84 v1(6513.78,2666.34) ; RN1.7 6560.5,3614.45 6560.64,3614.31 6590.41,3614.31 6599.66,3605.07 6599.66,3576.53 v1(6601.38,3574.8) ; PC2.- PC2.-@6658.01,2327.5 ; PC1.-@6658.01,2047.5 PC1.- ; C1.1 6705.53,2504.47 6782.93,2504.47 v1(6783.46,2503.94) v1@6787.4,2507.87 ; v1(6705,2675) U2.2 ; U1.1 U1.1@6720.01,1680 ; C3.1 v1(6770,3445)
  Top Layer w30: RESET.1 6342.68,2948.82 ; RESET.2 6342.68,2948.82 ; v1(6346.46,2720.47) 6346.46,2772.68 6342.68,2776.46 6342.68,2948.82
  Top Layer w40: ZU4.22@5915.45,2681.94 5925.27,2681.94 5975.61,2732.28 v1(6023.62,2732.28) 6023.62,2733.62 v1(6085,2795) ZU4.8@6205,2795
  Top Layer w50: PC1.-@6658.01,2047.5 PC2.-@6658.01,2327.5 ; U1.1@6720.01,1680 v1(6800,1680) ; v1(6755,3135) 6845,3135 ; POWER.6 6845,3135 ; POWER.7 6845,3135
  other v1: 6333.66,1356.3 6377.95,1399.61 6301.18,1431.1 6348.43,1469.49 6760.01,1680 6660,2155 6660,2245 5587.24,2341.81 5647.24,2341.81 5647.24,2396.81
IO0: IOL.1 RN4.2 ZU4.2 | length 1940.1
  Top Layer w10: IOL.1 5378.45,2730 5357.2,2708.75 5357.2,2707.2 5273.62,2623.62 5273.62,2222.44 5311.02,2185.04 RN4.2
  Signal_1 w10: IOL.1 6000,2730 6060,2670 6060,2335 ZU4.2
IO1: IOL.2 RN4.1 ZU4.3 | length 2043.7
  Top Layer w10: IOL.2 5386.42,2823.58 5428.39,2823.58 5459.65,2792.32 5459.65,2719.49 5411.42,2671.26 5388.78,2671.26 5315,2597.48 5315,2259.8 5358.27,2216.53 RN4.1
  Signal_1 w10: IOL.2 5950,2830 6090,2690 6090,2365 6170,2285 ZU4.3
IO2: IOL.3 ZU4.4 | length 1298.8
  Signal_1 w10: IOL.3 5995,2930 6115,2810 6115,2395 6125,2385 ZU4.4
IO3: IOL.4 ZU4.5 | length 1275.4
  Signal_1 w10: IOL.4 5980,3030 6140,2870 6140,2495 6150,2485 ZU4.5
IO4: IOL.5 ZU4.6 | length 1453.6
  Signal_1 w10: IOL.5 6025,3130 6119,3036 6258,3036 6295,2999 6295,2610 6275,2590 6215,2590 ZU4.6
IO5: IOL.6 ZU4.11 | length 898.3
  Signal_1 w10: IOL.6 5390,3240 6025,3240 6180,3085 ZU4.11
IO6: IOL.7 ZU4.12 | length 890.1
  Signal_1 w10: IOL.7 6025,3330 6170,3185 ZU4.12
IO7: IOL.8 ZU4.13 | length 998.2
  Top Layer w10: IOL.8 5381.51,3431.51 5381.51,3467.14 5404.37,3490 5990,3490 6110,3370 6110,3305.86 6130.86,3285 ZU4.13
IO8: IOH.1 ZU4.14 | length 1139.5
  Signal_1 w10: IOH.1 5195,3380.04 5287.4,3472.44 6122.56,3472.44 ZU4.14
IO9: IOH.2 ZU4.15 | length 779.2
  Signal_1 w10: IOH.2 5225,3230 5380,3385 ZU4.15
L13: RN2.8 U5.6 U5.7 | length 513.5
  Top Layer w10: RN2.8 5493.39,3420.56 5525.84,3453 5716.29,3453 5732.17,3437.12 U5.7 U5.6
M8RXD: RN4.7 U3.9 | length 157.3
  Top Layer w10: RN4.7 5447.83,2186.02 5499.02,2186.02 5548.34,2235.35 U3.9
M8TXD: RN4.8 U3.8 | length 130.5
  Top Layer w10: RN4.8 5448.12,2217.8 5448.12,2235.52 5483.27,2270.67 5514.93,2270.67 5520.78,2276.53 U3.8
MISO: ICSP.1 IOH.5 ZU4.18 | length 1892.5
  Signal_1 w10: IOH.5 5210,2930 5360,3080 5905,3080 ZU4.18 ; 5900,3090 5905,3095
  Bottom Layer w15: IOH.5 5211.5,2930 5211.5,2932.5 5291.34,3012.34 5291.34,3457.68 5371.06,3537.4 5403.54,3537.4 5633.86,3767.72 ICSP.1
MISO2: ICSP1.1 U3.17 | length 2850.6
  Top Layer w10: U3.17 5713.7,2278.42 v1(5767.72,2224.41)
  Signal_2 w10: v1(5767.72,2224.41) 5767.72,2227.36 5728.08,2267 5572.12,2267 5564.96,2259.84 5564.96,2147.64 5666.34,2046.26 5972.44,2046.26 6054.7,1964 6293.72,1964 6370.87,2041.14 ICSP1.1
MOSI: ICSP.4 IOH.4 ZU4.17 | length 1310.8
  Signal_1 w10: IOH.4 5220,3030 5375,3185 ZU4.17
  Signal_2 w10: ICSP.4 5867.13,3592.52 5867.13,3227.87 ZU4.17
MOSI2: ICSP1.4 U3.16 | length 2509.2
  Top Layer w10: U3.16 5686.14,2242.99 5696.85,2232.28 v1@5696.85,2208.66
  Signal_2 w10: v1(5696.85,2204.72) 5696.85,2177.17 5739.02,2135 5949.65,2135 6066.65,2018 6282.76,2018 6320.87,2056.1 6320.87,3396.65 6199.8,3517.72 6199.8,3644.69 ICSP1.4
NetC8_1: C8.1 U3.27 | length 165.2
  Top Layer w10: U3.27 5646.77,2490.28 5715.75,2559.25 C8.1
NetD1_A: D1.A J1.1 | length 555.6
  Top Layer w60: J1.1 6251.46,1592.52 6252.95,1594.02 6252.95,1701.77 6334.65,1783.47 D1.A
NetL_A: L.A RN2.1 | length 99.7
  Top Layer w10: RN2.1@5492.13,3191.02 RN2.1
  Top Layer w15: L.A RN2.1@5493.19,3193.98
NetON_A: ON.A RN4.5 RN4.6 | length 161.9
  Top Layer w10: RN4.5 RN4.5@5446.93,2121.97
  Top Layer w15: RN4.6 5446.99,2153.41 5470.59,2153.41 5484.84,2139.16 5484.84,2044.29 ON.A
NetRN2_6: RN2.6 TX.A | length 2295.8
  Top Layer w10: RN2.6 5556.38,3318.19 v1(5594.49,3356.3)
  Top Layer w15: v1(5486.22,1971.46) 5509.84,1947.83 TX.A
  Signal_2 w10: v1(5486.22,1971.46) 5436.02,1921.26 5231.3,1921.26 5189.96,1962.6 5189.96,2318.9 5291.34,2420.28 5291.34,3329.72 5343.5,3381.89 5568.9,3381.89 v1(5594.49,3356.3)
NetRN2_7: RN2.7 RX.A | length 516.1
  Top Layer w10: RN2.7 5524.88,3349.68 5562.01,3386.81 5624.02,3386.81 5671.26,3339.57 5671.26,3183.07 5685.08,3169.25 5685.08,3139.72 RX.A
PB4: JP2.1 U3.18 | length 1995.8
  Top Layer w10: U3.18 5757.2,2317.6 v1(5807.09,2267.72)
  Signal_2 w10: v1(5807.09,2267.72) 5841.54,2233.27 5964.25,2233.27 6156.5,2425.51 6156.5,3664.37 6136.81,3684.06 6041.34,3684.06 JP2.1
PB5: JP2.3 U3.19 | length 1645.6
  Top Layer w10: U3.19 5809.72,2337.28 v1(5830.71,2358.27)
  Signal_2 w10: v1(5830.71,2358.27) 5852.36,2336.61 5986.61,2336.61 6111.22,2461.22 6111.22,3606.3 JP2.3
PB6: JP2.2 U3.20 | length 1610.4
  Top Layer w10: U3.20 5778.23,2356.97 5830.71,2409.45 v1(5830.71,2429.13)
  Signal_2 w10: v1(5830.71,2429.13) 5926.18,2429.13 5963.58,2466.54 5963.58,3415.35 5927.17,3451.77 5927.17,3669.88 JP2.2
PB7: JP2.4 U3.21 | length 2106.9
  Top Layer w10: U3.21 5734.92,2376.65 5748.03,2389.76 5748.03,2452.76 5755.91,2460.63 v1(5783.46,2460.63)
  Signal_2 w10: v1(5783.46,2460.63) 5824.8,2501.97 5824.8,2853.35 5672.24,3005.91 5672.24,3334.65 5610.24,3396.65 5610.24,3766.73 5651.57,3808.07 6055.12,3808.07 6087.4,3775.79 JP2.4
RD+: RN3.4 U3.29 | length 1279.8
  Top Layer w10: U3.29 5607.4,2522.72 5625,2540.32 v1(5625,2543.31) ; RN3.4 5674.22,1912.41 5680.12,1918.31 v1(5715.55,1918.31)
  Bottom Layer w10: v1(5625,2543.31) 5625,2591 5554.58,2661.42 5517.72,2661.42 5395.67,2539.37 5395.67,2332.33 5715.55,2012.45 v1(5715.55,1918.31)
RD-: RN3.1 U3.30 | length 879
  Top Layer w10: v1(5587.6,2543.31) 5587.66,2543.25 U3.30 U3.30 ; RN3.1 RN3.1@5770.18,1875.49 ; v1@5770.18,1913.88 v1(5771.65,1915.35)
  Top Layer w15: RN3.1@5770.18,1875.49 v1@5770.18,1913.88
  Bottom Layer w10: v1(5587.6,2543.31) 5587.6,2490.16 5524.61,2427.17 5524.61,2244.39 5771.65,1997.35 v1(5771.65,1915.35)
RESET: C5.2 D2.A ICSP.5 POWER.3 RESET-EN.1 RESET-EN.2 RESET.3 RESET.4 RN1.4 ZU4.1 | length 4644.6
  Top Layer w10: 5715.55,2025.59 RESET-EN.2 ; RESET-EN.2@5743.66,2030.59 RESET-EN.2 ; ZU4.1 6210,1947.48 6251.97,1905.51 6251.97,1822.83 6204.72,1775.59 5942.91,1775.59 5874.02,1844.49 5874.02,1982.28 5830.71,2025.59 RESET-EN.2 ; v1(6466.54,3511.81) 6466.96,3512.24 6466.96,3538.81 6479.61,3551.46 RN1.4 6502.2,3429.85 6588,3344.05 6588,3131.31 6560.07,3103.38 RESET.4 ; D2.A@6567.63,2650.31 D2.A
  Top Layer w15: RESET.3 6573.78,2772.68 ; D2.A 6586.61,2759.84 6573.78,2772.68 ; POWER.3 6841.25,2781.25 6582.34,2781.25 6573.78,2772.68
  Top Layer w20: RESET-EN.2@5743.66,2030.59 C5.2
  Top Layer w40: RESET.3 RESET.4
  Signal_1 w10: ICSP.5 5691.93,3545.28 5722.44,3514.76 6185.04,3514.76 6231.3,3468.5 6423.23,3468.5 v1(6466.54,3511.81)
  Bottom Layer w15: ZU4.1 6691.3,2085 6746.06,2139.76 6746.06,2744.09 6786.97,2785 POWER.3
RESET2: D3.A ICSP1.5 RN1.6 U3.24 | length 6366.6
  Top Layer w10: U3.24 5713.7,2465.67 v1(5767.72,2519.69) ; ICSP1.5 6512.2,3744.69 6529.53,3727.36 6529.53,3590.55 6536.42,3583.66 6554.63,3583.66 RN1.6
  Top Layer w15: D3.A 5194.27,1977.74 5204.74,1977.74 5277.56,2050.56 v1(5277.56,2070.87)
  Signal_2 w10: v1(5277.56,2070.87) 5497.13,2070.87 5596.54,1971.46 5774.61,1971.46 5956.69,1789.37 6254.92,1789.37 6468.37,2002.82 6468.37,3457.55 6505.91,3495.08 6505.91,3704.72 6465.94,3744.69 ICSP1.5
  Bottom Layer w10: v1(5277.56,2070.87) 5277.56,2010.83 5372.05,1916.34 5548.23,1916.34 5574.8,1889.76 5574.8,1576.77 5619.09,1532.48 5841.54,1532.48 5959.65,1650.59 5959.65,1735.24 5830.71,1864.17 5830.71,2199.71 5864.27,2233.27 5986.22,2233.27 6020.67,2267.72 6020.67,2504.92 5991.14,2534.45 5782.48,2534.45 v1(5767.72,2519.69)
RXLED: RX.C U3.10 | length 1528.9
  Top Layer w10: v1(5517.72,2162.4) 5519.73,2162.4 5567.52,2210.19 5567.52,2269.84 U3.10 ; v1(5776.57,3060.04) 5776.57,3113.19 RX.C
  Bottom Layer w10: v1(5517.72,2162.4) 5300.2,2379.92 5300.2,2836.61 5341.54,2877.95 5431.1,2877.95 5613.19,3060.04 v1(5776.57,3060.04)
SCK: ICSP.3 IOH.6 U5.5 ZU4.19 | length 2184.4
  Top Layer w10: U5.5 U5.5 5783.41,3432.03 v1(5783.46,3432.09)
  Signal_1 w10: IOH.6 5220,2830 5370,2980 5905,2980 ZU4.19 ; 5900,2990 5905,2995
  Bottom Layer w10: IOH.6 5199.09,2830 5349.41,2980.32 5432.09,2980.32 5455.71,3003.94 5455.71,3334.65 5571.85,3450.79 5617.13,3450.79 5640.75,3474.41 ; ZU4.19@5887.2,3007.8 5887.2,3006.25 5908.45,2985 ZU4.19
  Bottom Layer w15: ICSP.3 5688.12,3663.9 5648.16,3663.9 5626.97,3642.72 5626.97,3488.19 5640.75,3474.41 5654.53,3460.63 5754.92,3460.63 v1(5783.46,3432.09)
SCK2: ICSP1.3 U3.15 | length 3553.6
  Top Layer w10: v1@5645.67,2208.66 5645.67,2224.41 5666.45,2245.19 U3.15
  Signal_2 w10: v1(5645.67,2204.72) 5645.67,2232.14 5651.53,2238 5710.82,2238 5733.27,2215.55 5733.27,2193.73 5755,2172 5795.03,2172 5807.09,2184.06 5807.09,2224.41 5737.2,2294.29 5529.53,2294.29 5481.3,2246.06 5481.3,2141.7 5614.14,2008.86 5934.06,2008.86 6027.91,1915 6307,1915 6424.21,2032.21 6424.21,3604.33 6383.86,3644.69 ICSP1.3
SS: IOH.3 ZU4.16 | length 779.2
  Signal_1 w10: IOH.3 5350,3285 ZU4.16
TXLED: TX.C U3.11 | length 248.4
  Top Layer w10: TX.C 5566.93,2075.79 5587.71,2096.57 U3.11
UGND: C8.2 GROUND.2 J?.4 L1.1 U3.28 | length 1833.5
  Top Layer w10: L1.1 L1.1@5481.34,2666.85 ; GROUND.2 GROUND.2@5598.76,2669.89 ; U3.28 5627.08,2504.05 5646.65,2523.62 5646.65,2613.19 5667.32,2633.86 5707.68,2633.86 5715.75,2641.93 C8.2
  Top Layer w30: L1.1@5481.34,2666.85 GROUND.2 ; GROUND.2@5598.76,2669.89 v1(5657.25,2669.89) C8.2
  Top Layer w50: J?.4@5747.44,1599.61 v2@5843.7,1599.61
  Signal_1 w10: J?.4 J?.4@5747.44,1599.61
  Bottom Layer w10: v1(5657.25,2669.89) 5737.2,2589.94 5737.2,2410.43 5757.87,2389.76 5757.87,2386.81 5839.59,2305.09 5842.52,2302.17 5842.52,2252.95 5800.2,2210.63 5800.2,1830.71 5905.51,1725.39 5905.51,1661.42 v2(5845.47,1601.38)
USBVCC: F1.1 T1.1
USHIELD: J?.5 J?.6 L1.2 Z1.2 Z2.2 | length 2405
  Top Layer w10: Z1.2 Z1.2@5235.95,1600.32 ; Z2.2@5235.95,1679.69 Z2.2 ; v1(5460.63,2518.7) 5462.6,2518.7 5480.75,2536.85 L1.2
  Top Layer w30: Z1.2 5235.63,1555.71 5294.73,1496.61 J?.5@5459.57,1496.61 ; Z1.2@5235.95,1600.32 Z2.2@5235.95,1679.69
  Top Layer w50: J?.5@5459.57,1496.61 J?.6@5932.01,1496.61
  Signal_2 w10: v1(5460.63,2518.7) 5239.17,2297.24 5239.17,1994.05 5270.62,1962.6 5328.74,1962.6 5399.61,2033.46 5475.54,2033.46 5555.12,1953.88 5555.12,1553.15 v1(5612.2,1496.06)
VIN: D1.C PC1.+ POWER.8 RN1.8 U1.3 | length 2637
  Top Layer w10: RN1.8 6590.28,3645.94 6716.54,3519.69 6716.54,3358.27 6789.8,3285 POWER.8
  Top Layer w40: U1.3 6534,1704.01 6530,1708.01 6488.43,1708.01 6465,1731.44 6465,1910 6535,1980 6830,1980 6849.49,1999.49 PC1.+ v1(6849.49,2141.81)
  Bottom Layer w40: POWER.8 6915.54,3285 6938.98,3261.57 6938.98,2231.3 v1(6849.49,2141.81)
XT1: C9.1 R1.1 U3.1 Y1.2 | length 2639.3
  Top Layer w10: v1(5467.52,2455.71) 5487.52,2435.71 U3.1 ; v1(5784.45,2615.16) 5788.03,2611.57 5788.03,2575.16 5829.72,2533.46 5985.24,2533.46 6001.97,2516.73 6001.97,2000.98 5965,1964.02 Y1.2 6025.28,1855 6062.99,1892.72 6062.99,2578.74 6118.11,2633.86 6283.46,2633.86 6314.45,2664.84 C9.1 R1.1
  Signal_1 w10: v1(5467.52,2455.71) 5487.52,2435.71 5562.68,2435.71 5742.13,2615.16 v1(5784.45,2615.16)
XT2: C11.1 R1.2 U3.2 Y1.1 | length 3377.8
  Top Layer w10: v1(5347.44,2500) 5358.26,2500 5370.48,2487.79 5393.55,2487.79 C11.1 5400.59,2428.15 5412.72,2416.02 U3.2 ; Y1.1 6165,1960.98 6098.43,2027.56 6098.43,2492.13 6141.73,2535.43 6295.28,2535.43 6314.96,2515.75 6405.51,2515.75 6424.25,2534.49 6424.25,2562.94 R1.2
  Top Layer w15: R1.2 6430.73,2563.36 6450.64,2563.36 6534.7,2479.3 6534.7,2464.32 v1(6536.42,2462.6)
  Signal_1 w10: v1(5347.44,2500) 5347.44,2360.65 5404.46,2303.63 5841.06,2303.63 5867.15,2329.72 5937.99,2329.72 5953.74,2313.98 5953.74,2164.37 6122.05,1996.06 6295.06,1996.06 6536.42,2237.42 v1(6536.42,2462.6)
XTAL1: R2.1 Y2.3 ZU4.9 | length 809.5
  Top Layer w10: Y2.3 Y2.3@6355.08,2329.76 ; R2.1@6355.08,2458.55 R2.1
  Top Layer w15: v1(6295.28,2343.5) 6312.13,2326.65 Y2.3 ; Y2.3@6355.08,2329.76 R2.1@6355.08,2458.55
  Bottom Layer w10: ZU4.9 ZU4.9@6213.38,2881.62
  Bottom Layer w15: ZU4.9@6213.38,2881.62 6267,2881.62 6295.28,2853.35 v1(6295.28,2343.5)
XTAL2: R2.2 Y2.1 ZU4.10 | length 1077
  Top Layer w10: R2.2 R2.2@6429.45,2460.39 ; Y2.1@6429.45,2327.92 Y2.1
  Top Layer w15: Y2.1@6429.45,2327.92 R2.2@6429.45,2460.39 ; Y2.1 v1(6506.02,2326.65)
  Bottom Layer w15: ZU4.10 6308.31,2985 6394,2899.31 6394,2392.42 6459.76,2326.65 v1(6506.02,2326.65)
XUSB: F1.2 J?.1 | length 2283.4
  Top Layer w10: F1.2 F1.2@6515.75,3246.06
  Top Layer w15: F1.2@6515.75,3246.06 v1(6557.09,3246.06)
  Top Layer w50: J?.1 5809.06,1676.18 v2@5830.71,1697.83
  Signal_2 w10: v2(5841.54,1697.83) 6280.51,1697.83 6582.68,2000 6582.68,3101.38 6557.09,3126.97 v1(6557.09,3246.06)
pads on no net: POWER.1 RESET.5 RN3.2 RN3.3 RN3.6 RN3.7 U2.4 U3.5 U3.6 U3.7 U3.12 U3.14 U3.22 U3.23 U3.25 U3.26 U3.31

## Polygon pours and split planes (outlines as drawn)
SCK on Bottom Layer "SCK_L06_P000" (solid, pour order 0): 5652.56,3445.87 5610.24,3445.87 5610.24,3484.25 5621.06,3495.08 5621.06,3496.06 5622.05,3496.06 5662.4,3455.71
+5V on Power (split plane): 309 vertices, not listed, extent 5059.89,1301.73 6988.33,3820.73
+5V on Power (split plane): 5439.55,3747.66 5439.54,3747.66
GND on Gnd (split plane): 309 vertices, not listed, extent 5059.89,1301.73 6988.33,3820.73
GND on Gnd (split plane): 5439.55,3747.66 5439.54,3747.66

## Other copper
Top Layer:
  region net GND: 6184.06,1369.09 6352.36,1537.4 6445.87,1537.4 6461.61,1521.65 6461.61,1375.98 6409.45,1319.88 6191.93,1316.93
  region net +5V: 5380.91,2130.91 5380.91,2145.67 5406.5,2145.67 5406.5,2130.91
  region net RESET: 5688.98,2057.09 5730.31,2057.09 5730.31,1994.09 5688.98,1994.09
  region net L13: 5728.35,3405.51 5763.03,3405.51 5757.67,3362.2 5728.35,3362.2
  region net NetON_A: 5434.06,2130.91 5434.06,2144.68 5459.65,2144.68 5459.65,2130.91
  region net USBVCC: 6307.09,3326.77 6322.83,3377.95 6362.2,3377.95 6381.89,3326.77
  region net VIN: 6790,1995 6790,2020 6800,2030 6810,2020 6835,2020 6835,1995 6830,1990
  region net VIN: 6555.12,2062.99 6555.12,2000 6472.44,1917.32 6444.88,1913.39 6444.88,2043.31 6464.57,2062.99
  region net VIN: 6515,1640 6445,1640 6445,1730 6480,1690 6515,1690

## Silkscreen, mask and mechanical layers (free items; w line width, h text height)
Mechanical 1:
  circle w0.25: c5664.27,3707.45 r0.12
  circle w0.25: c6024.11,3840.76 r0.12
  circle w0.25: c3149.86,3937.26 r0.12
  circle w0.25: c5118.36,3937.26 r0.12
  circle w0.25: c0.25,0.25 r0.12
  circle w0.25: c4523.95,4214.31 r0.12
  circle w0.25: c0.25,590.8 r0.12
  circle w0.25: c0.25,197.1 r0.12
  circle w0.25: c1968.75,590.8 r0.12
  circle w0.25: c0.25,2165.6 r0.12
  circle w0.25: c10.25,65.25 r0.12
  circle w0.25: c0.25,15.25 r0.12
  circle w0.25: c40.25,65.25 r0.12
  circle w0.25: c0.25,5.25 r0.12
  circle w0.25: c50.25,15.25 r0.12
  circle w0.25: c25.25,65.25 r0.12
  circle w0.25: c50.25,55.25 r0.12
  circle w0.25: c0.25,55.25 r0.12
  circle w0.25: c4523.95,4214.31 r0.12
  circle w0.25: c0.25,197.1 r0.12
  circle w0.25: c0.25,2165.6 r0.12
  circle w0.25: c0.25,393.95 r0.12
  circle w0.25: c0.25,0.25 r0.12
  circle w0.25: c0.25,2362.45 r0.12
  lines w0.5: 25.25,15.25 25.25,55.25 ; 5239.83,1884.15 5239.83,2002.26 ; 5519.83,1754.15 5165.5,1754.15 ccw(c5519.83,1650.8) 5519.83,1281.71 6528.39,1281.71 ccw(c6528.39,1650.8) 6882.72,1754.15 6528.39,1754.15 6528.39,1872.26 6890.25,1872.26 ccw(c6890.25,1990.37) 7008.36,1990.37 7008.36,3407.69 ccw(c6968.99,3407.69) 6968.99,3447.06 cw(c7030.75,3858.94) 6628.02,3752.76 ccw(c6513.82,3722.65) 6513.82,3840.76 5534.4,3840.76 ccw(c5534.4,3722.65) 5420.19,3752.76 cw(c5017.47,3858.94) 5079.23,3447.06 ccw(c5079.23,3407.69) 5039.86,3407.69 5039.86,1990.37 ccw(c5157.97,1990.37) 5157.97,1872.26 5519.83,1872.26 ; 0.25,18.25 ccw(c3.25,18.25) 3.25,15.25 12.44,15.25 12.44,12.25 3.44,12.25 ccw(c12.44,9.62) 12.44,0.25 38.06,0.25 ccw(c38.06,9.62) 47.06,12.25 38.06,12.25 38.06,15.25 47.25,15.25 ccw(c47.25,18.25) 50.25,18.25 50.25,54.25 ccw(c49.25,54.25) 49.25,55.25 cw(c50.82,65.71) 40.59,63.01 ccw(c37.69,62.25) 37.69,65.25 12.81,65.25 ccw(c12.81,62.25) 9.91,63.01 cw(c-0.32,65.71) 1.25,55.25 ccw(c1.25,54.25) 0.25,54.25 0.25,18.25

## Text inside footprints (layer, text, board x,y; h text height)
U1: Mechanical 7 "2" at 6675.81,1732.38 h49.6 r180; Mechanical 7 "1" at 6760.93,1732.01 h49.6 r180; Mechanical 7 "4" at 6550,1462.01 h49.6 r180; Mechanical 7 "3" at 6584.81,1732.01 h49.6 r180
U3: Mechanical 7 "1" at 5495.19,2445.55 h49.6